# EAGLE board Board_Schamatic07 (EAGLE 9.6.2)
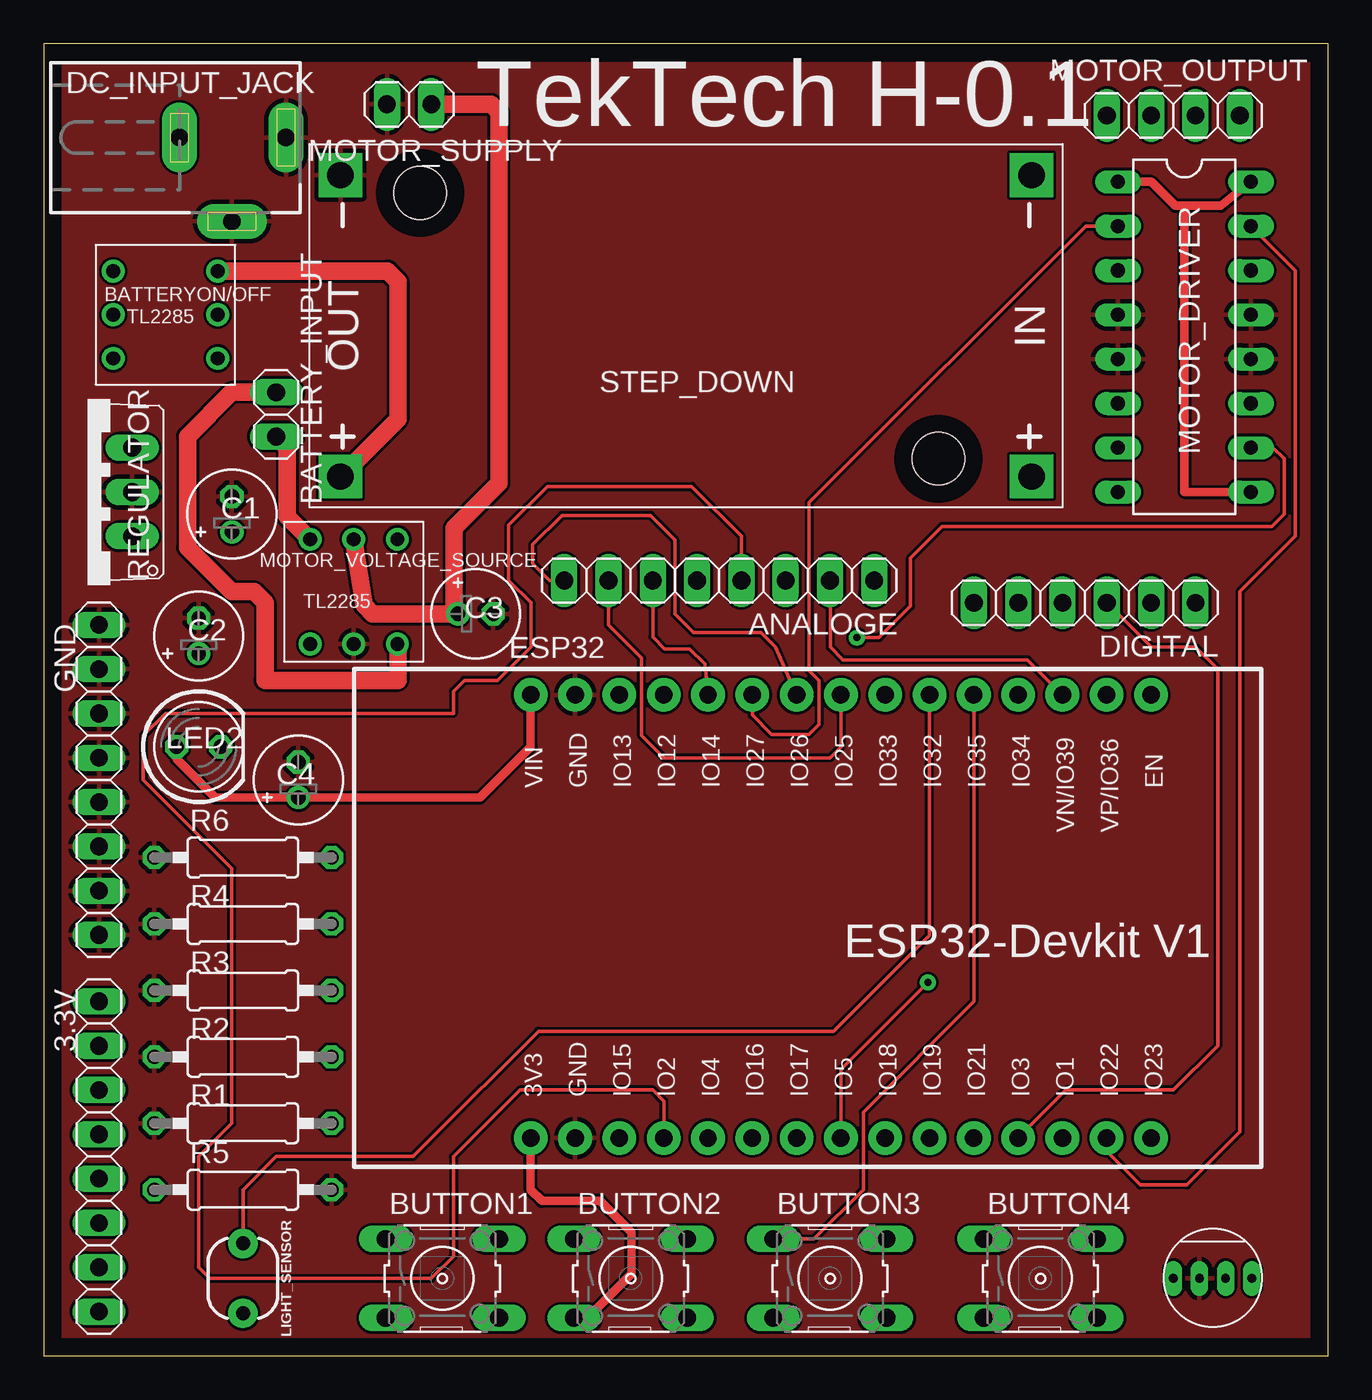
[diagram p0: board, top side]
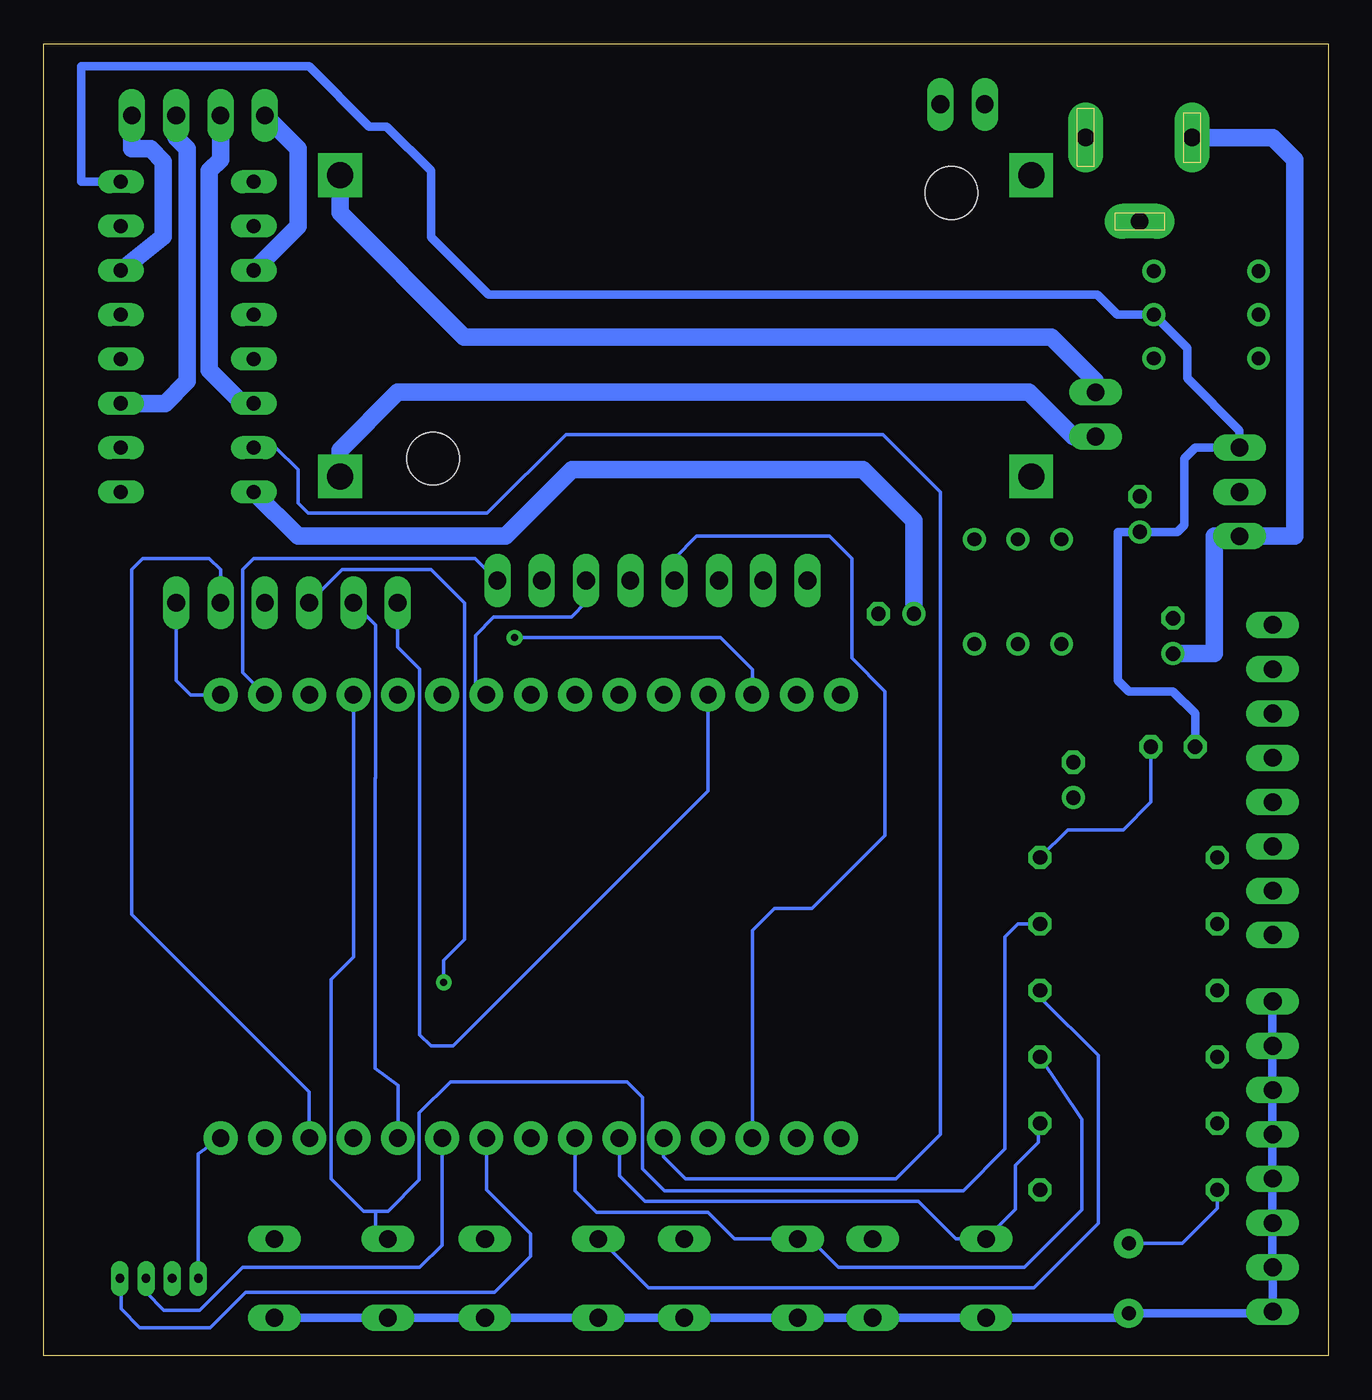
[diagram p1: board, bottom side, seen from below]

Size 73.64 x 75.23 mm. Coordinates in mm from the lower left corner, seen from the top.
Outline: 0,0 73.64,0 73.64,75.23 0,75.23 0,0
Copper layers (1*16): Top 0.035mm / dielectric 1.5mm / Bottom 0.035mm
Design rules "default *": minimum track width 7mil, minimum drill 0.4mm, track to track 6mil, track to pad 6mil, pad to pad 6mil, via to via 6mil, smd to smd 6mil, copper to edge 40mil, drill to drill 6mil, minimum pad ring 10mil, minimum via ring 10mil, stop-mask expansion 4mil, vias tented up to drill 0mil, thermal gap 10mil

## Footprints (pad centres in the part's own frame; a part is rotated, then mirrored left to right if it is on the bottom)
1X08 = drill 1.016 long: 1 -8.89,0; 2 -6.35,0; 3 -3.81,0; 4 -1.27,0; 5 1.27,0; 6 3.81,0; 7 6.35,0; 8 8.89,0
1X02 = drill 1.016 long: 1 -1.27,0; 2 1.27,0
TL2285_PCB = drill 0.8: 1 -2.5,-3; 2 0,-3; 3 2.5,-3; 4 -2.5,3; 5 0,3; 6 2.5,3
B3F-10XX = drill 1.016 long: 1 -3.251,2.261; 2 3.251,2.261; 3 -3.251,-2.261; 4 3.251,-2.261
E2-5 = drill 0.813 pad 1.27: + -1.016,0 | drill 0.813 pad 1.27 octagon: - 1.016,0
DCJ0202 = drill 1 pad 2 long: 1 0,3.1; 2 4.8,0; 3 0,-3
1X06 = drill 1.016 long: 1 -6.35,0; 2 -3.81,0; 3 -1.27,0; 4 1.27,0; 5 3.81,0; 6 6.35,0
ESP32-DEVKITV1 = drill 1 pad 1.93: 3V3 -16.52,-12.27; D1 13.96,-12.27; D2 -8.9,-12.27; D3 11.42,-12.27; D4 -6.36,-12.27; D5 1.26,-12.27; D12 -8.9,13.135; D13 -11.44,13.135; D14 -6.36,13.135; D15 -11.44,-12.27; D16 -3.82,-12.27; D17 -1.28,-12.27; D18 3.8,-12.27; D19 6.34,-12.27; D21 8.88,-12.27; D22 16.5,-12.27; D23 19.04,-12.27; D25 1.26,13.135; D26 -1.28,13.135; D27 -3.82,13.135; D32 6.34,13.135; D33 3.8,13.135; D34 11.42,13.135; D35 8.88,13.135; D36 16.5,13.135; D39 13.96,13.135; EN 19.04,13.135; GND@1 -13.98,13.135; GND@2 -13.98,-12.27; VIN -16.52,13.135
LED5MM = drill 0.813 octagon: A -1.27,0; K 1.27,0
PHOTOCELL = drill 0.8 pad 1.676: 1 -2,0; 2 2,0
DIL16 = drill 0.813 long: 1 -8.89,-3.81; 2 -6.35,-3.81; 3 -3.81,-3.81; 4 -1.27,-3.81; 5 1.27,-3.81; 6 3.81,-3.81; 7 6.35,-3.81; 8 8.89,-3.81; 9 8.89,3.81; 10 6.35,3.81; 11 3.81,3.81; 12 1.27,3.81; 13 -1.27,3.81; 14 -3.81,3.81; 15 -6.35,3.81; 16 -8.89,3.81
1X04 = drill 1.016 long: 1 -3.81,0; 2 -1.27,0; 3 1.27,0; 4 3.81,0
0207/10 = drill 0.813 octagon: 1 -5.08,0; 2 5.08,0
TO220V = drill 1.016 long: 1 -2.54,-2.54; 2 0,-2.54; 3 2.54,-2.54
LED-4_PIN = drill 0.5 long: P$1 0,0; P$2 0,4.5; P$5 0,1.5; P$7 0,3
DC-DC-STEP-DOWN-LM2596 = drill 1.5 pad 2.5 square: IN+ -19.812,8.636; IN- -19.812,-8.636; OUT+ 19.812,8.636; OUT- 19.812,-8.636 | hole 3: -14.478,7.62; 15.24,-7.62

## Placement (x,y rotation side)
3.3V  [1X08]  3.17,11.43 270 top
ANALOGE  [1X08]  38.73,44.45 180 top
BATTERY_INPUT  [1X02]  13.34,53.98 90 top
BATTERYON/OFF  TL2285  [TL2285_PCB]  6.99,59.69 90 top
BUTTON1  [B3F-10XX]  22.86,4.45 0 top
BUTTON2  [B3F-10XX]  33.66,4.45 0 top
BUTTON3  [B3F-10XX]  45.09,4.45 0 top
BUTTON4  [B3F-10XX]  57.15,4.45 0 top
C1  100uf  [E2-5]  10.79,48.26 90 top
C2  470uf  [E2-5]  8.89,41.27 90 top
C3  100uf  [E2-5]  24.77,42.55 0 top
C4  100uf  [E2-5]  14.61,33.02 90 top
DC_INPUT_JACK  DCJ0202  [DCJ0202]  10.79,69.85 270 top
DIGITAL  [1X06]  59.69,43.18 180 top
ESP32  ESP32DEVKITV1  [ESP32-DEVKITV1]  44.45,24.77 0 top
GND  [1X08]  3.17,33.02 270 top
LED2  [LED5MM]  8.89,34.92 0 top
LIGHT_SENSOR  PHOTOCELLPTH  [PHOTOCELL]  11.43,4.45 270 top
MOTOR_DRIVER  L293D  [DIL16]  65.41,58.42 270 top
MOTOR_OUTPUT  [1X04]  64.77,71.12 180 top
MOTOR_SUPPLY  [1X02]  20.95,71.75 0 top
MOTOR_VOLTAGE_SOURCE  TL2285  [TL2285_PCB]  17.78,43.81 180 top
R1  10k  [0207/10]  11.43,13.34 180 top
R2  10k  [0207/10]  11.43,17.14 180 top
R3  10k  [0207/10]  11.43,20.95 180 top
R4  10k  [0207/10]  11.43,24.77 180 top
R5  10k  [0207/10]  11.43,9.53 0 top
R6  220  [0207/10]  11.43,28.57 0 top
REGULATOR  7805TV  [TO220V]  2.54,49.53 90 top
RGB  [LED-4_PIN]  64.77,4.45 270 top
STEP_DOWN  DC-DC-STEP-DOWN-LM2596  [DC-DC-STEP-DOWN-LM2596]  36.83,59.05 180 top

## Library data of the parts
3.3V ANALOGE BATTERY_INPUT DIGITAL GND MOTOR_OUTPUT MOTOR_SUPPLY = pinhead
BATTERYON/OFF MOTOR_VOLTAGE_SOURCE = L71_devices
BUTTON1-BUTTON4 = switch-omron; MPN: B3F-1000; OC_FARNELL: 176432; OC_NEWARK: 36M3542
C1-C4 = rcl; SPICEPREFIX: C
DC_INPUT_JACK = con-jack; OC_FARNELL: unknown; OC_NEWARK: unknown
ESP32 = ESP32-DEVKITV1
LED2 = led
LIGHT_SENSOR = SparkFun-Sensors; PROD_ID: COMP-09129; SF_ID: SEN-09088
MOTOR_DRIVER = st-microelectronics; MPN: L293D; OC_FARNELL: 9589619; OC_NEWARK: 56P8249
R1-R6 = rcl; SPICEPREFIX: R
REGULATOR = linear
RGB = RGB-Led
STEP_DOWN = diy-modules

## Nets
3.3V: 3.3V.1 3.3V.2 3.3V.3 3.3V.4 3.3V.5 3.3V.6 3.3V.7 3.3V.8 BUTTON1.3 BUTTON1.4 BUTTON2.3 BUTTON2.4 BUTTON3.3 BUTTON3.4 BUTTON4.3 BUTTON4.4 ESP32.3V3 LIGHT_SENSOR.2
5-12V: C3.+ MOTOR_DRIVER.8 MOTOR_SUPPLY.2 MOTOR_VOLTAGE_SOURCE.2
5V: BATTERYON/OFF.2 C1.+ C4.+ ESP32.VIN LED2.A MOTOR_DRIVER.1 MOTOR_DRIVER.9 MOTOR_DRIVER.16 REGULATOR.3
+V: BATTERY_INPUT.1 MOTOR_VOLTAGE_SOURCE.3 STEP_DOWN.IN+
-V: BATTERY_INPUT.2 MOTOR_VOLTAGE_SOURCE.4 STEP_DOWN.IN-
A1CH0: ANALOGE.1 ESP32.D36
A1CH3: ANALOGE.2 ESP32.D39
A1CH5: ANALOGE.3 ESP32.D33
A2CH2: ANALOGE.4 ESP32.D2
A2CH3: ANALOGE.5 ESP32.D15
A2CH6: ANALOGE.6 ESP32.D14
A2CH8: ANALOGE.7 ESP32.D25
A2CH9: ANALOGE.8 ESP32.D26
BLUE: ESP32.D18 RGB.P$2
D1: DIGITAL.2 ESP32.D1
D3: DIGITAL.3 ESP32.D3
D5: DIGITAL.4 ESP32.D5
D12: DIGITAL.6 ESP32.D12
D21: DIGITAL.5 ESP32.D21
EN: DIGITAL.1 ESP32.EN
GND: C1.- C2.- C3.- C4.- DC_INPUT_JACK.1 DC_INPUT_JACK.2 ESP32.GND@1 ESP32.GND@2 GND.1 GND.2 GND.3 GND.4 GND.5 GND.6 GND.7 GND.8 MOTOR_DRIVER.4 MOTOR_DRIVER.5 MOTOR_DRIVER.12 MOTOR_DRIVER.13 MOTOR_SUPPLY.1 MOTOR_VOLTAGE_SOURCE.5 R1.2 R2.2 R3.2 R4.2 R5.2 R6.1 REGULATOR.2 RGB.P$5 STEP_DOWN.OUT-
GREEN: ESP32.D19 RGB.P$7
IN: C2.+ DC_INPUT_JACK.3 REGULATOR.1
IN1-1: ESP32.D27 MOTOR_DRIVER.2
IN1-2: ESP32.D4 MOTOR_DRIVER.7
IN2-1: ESP32.D22 MOTOR_DRIVER.15
IN2-2: ESP32.D13 MOTOR_DRIVER.10
N$2: BATTERYON/OFF.3 STEP_DOWN.OUT+
N$4: LED2.K R6.2
N$5: BUTTON3.1 ESP32.D35 R3.1
N$6: BUTTON4.1 ESP32.D34 R4.1
N$9: ESP32.D32 LIGHT_SENSOR.1 R5.1
N$10: BUTTON1.1 ESP32.D16 R1.1
N$11: BUTTON2.1 ESP32.D17 R2.1
O1-1: MOTOR_DRIVER.3 MOTOR_OUTPUT.4
O1-2: MOTOR_DRIVER.6 MOTOR_OUTPUT.3
O2-1: MOTOR_DRIVER.14 MOTOR_OUTPUT.1
O2-2: MOTOR_DRIVER.11 MOTOR_OUTPUT.2
RED: ESP32.D23 RGB.P$1

## Tracks (layer width: path | path; a pad name or v marks a point on that pad's centre or on a via)
3.3V
  Top 0.5: BUTTON2.3 31.19,2.18 33.72,4.71 33.72,7.1 31.91,8.9 31.9,8.89 28.57,8.89 27.93,9.54 ESP32.3V3
  Bottom 0.5: 3.2,15.24 3.2,17.68 3.3V.2 3.2,17.83 3.2,20.27 3.3V.1 | 3.2,7.62 3.2,5.18 3.17,5.16 3.3V.7 3.3V.8 3.25,2.54 3.35,2.44 LIGHT_SENSOR.2 11.69,2.18 BUTTON1.3 19.71,2.29 19.81,2.18 BUTTON1.4 BUTTON2.3 BUTTON2.4 BUTTON3.3 41.76,2.29 41.86,2.18 BUTTON3.4 BUTTON4.3 BUTTON4.4 | 3.2,7.62 3.2,10.06 3.3V.5 3.2,10.21 3.2,12.65 3.3V.4 3.2,12.8 3.2,15.24 | 3.2,7.62 3.3V.6 | 3.2,15.24 3.3V.3
5-12V
  Top 0.813: 23.55,42.75 C3.+
  Top 1: MOTOR_VOLTAGE_SOURCE.2 18.37,43.04 18.86,42.55 C3.+ | MOTOR_SUPPLY.2 25.65,71.75 26.11,71.3 26.11,50.04 23.55,47.47 23.55,42.75
  Bottom 1: MOTOR_DRIVER.8 59.05,46.99 47.17,46.99 43.36,50.8 26.67,50.8 23.75,47.88 C3.+
5V
  Top 0.5: 65.41,65.94 67.5,65.94 MOTOR_DRIVER.16 | 65.41,65.94 64.87,65.94 63.5,67.31 MOTOR_DRIVER.1 | LED2.A 7.62,34.21 9.83,32 C4.+ 25.02,32 27.93,34.91 ESP32.VIN | 65.41,65.94 65.41,49.53 MOTOR_DRIVER.9
  Bottom 0.5: MOTOR_DRIVER.16 71.49,67.31 71.49,73.94 58.42,73.94 54.97,70.48 53.98,70.48 51.44,67.94 51.44,64.14 48.13,60.83 13.23,60.83 12.09,59.69 BATTERYON/OFF.2 8.08,57.78 8.08,56.05 5.08,53.05 REGULATOR.3 7.62,52.07 8.26,51.44 8.26,47.62 8.64,47.24 C1.+ 12.06,47.24 12.06,38.73 11.43,38.1 8.89,38.1 7.62,36.83 LED2.A
+V
  Top 1: BATTERY_INPUT.1 13.97,52.07 13.97,48.12 MOTOR_VOLTAGE_SOURCE.3
  Bottom 1: STEP_DOWN.IN+ 56.64,51.94 53.34,55.24 17.14,55.24 14.61,52.7 BATTERY_INPUT.1
-V
  Top 1: BATTERY_INPUT.2 10.79,55.24 8.26,52.7 8.26,46.35 10.79,43.81 12.06,43.81 12.7,43.18 12.7,38.73 20.32,38.73 20.32,40.77 MOTOR_VOLTAGE_SOURCE.4
  Bottom 1: STEP_DOWN.IN- 56.64,65.53 49.53,58.42 15.88,58.42 13.34,55.88 BATTERY_INPUT.2
A1CH0
  Bottom 0.203: ANALOGE.1 48.9,45.72 61.59,45.72 62.23,45.09 62.23,39.18 ESP32.D36
A1CH3
  Top 0.203: ANALOGE.2 45.11,44.42 45.11,40.64 45.1,40.63 45.83,39.9 47.62,39.9 56.41,39.9 ESP32.D39
A1CH5
  Bottom 0.203: ESP32.D33 48.88,38.53 48.88,41.31 47.83,42.37 43.38,42.37 42.55,43.2 ANALOGE.3
A2CH2
  Top 0.203: ESP32.D2 35.56,14.61 34.92,15.24 27.3,15.24 23.5,11.43 23.5,5.71 22.23,4.45 9.53,4.45 8.89,5.08 8.89,11.43 10.79,13.34 10.79,27.94 10.48,28.26 5.71,33.02 5.71,35.56 6.99,36.83 23.5,36.83 23.5,38.1 24.13,38.73 26.04,38.73 27.94,40.64 27.94,43.18 26.67,44.45 26.67,47.62 28.89,49.85 37.15,49.85 40.01,46.99 ANALOGE.4
A2CH3
  Bottom 0.203: ESP32.D15 33.01,17.78 33.01,24.39 31.75,25.65 29.59,25.65 25.4,29.84 25.4,38.1 27.3,40.01 27.3,45.72 28.57,46.99 36.2,46.99 37.47,45.72 ANALOGE.5
A2CH6
  Top 0.203: ESP32.D14 37.91,39.66 37.03,40.54 35.61,40.54 34.92,41.22 ANALOGE.6
A2CH8
  Top 0.203: ESP32.D25 45.71,34.91 45.09,34.29 35.56,34.29 34.29,35.56 34.29,40.01 32.38,41.91 ANALOGE.7
A2CH9
  Top 0.203: ESP32.D26 41.95,40.65 41.12,41.48 37.26,41.48 36.2,42.55 36.2,46.79 34.8,48.18 29.72,48.18 28.04,46.51 28.04,45.72 28.04,45.41 29.01,44.45 ANALOGE.8
BLUE
  Bottom 0.203: RGB.P$2 69.19,4.42 69.19,2.69 68.12,1.63 64.08,1.63 62.06,3.65 47.79,3.65 45.72,5.71 45.72,7 48.25,9.53 ESP32.D18
D1
  Bottom 0.203: DIGITAL.2 63.5,45.09 64.14,45.72 67.94,45.72 68.58,45.09 68.58,25.31 58.41,15.14 ESP32.D1
D3
  Top 0.203: DIGITAL.3 63.5,40.64 66.04,40.64 67.31,39.37 67.31,17.78 64.77,15.24 58.62,15.24 ESP32.D3
D5  (via drill 0.4)
  Top 0.203: ESP32.D5 45.71,16.42 v50.7,21.41
  Bottom 0.203: v50.7,21.41 50.7,22.68 49.51,23.88 49.51,43.16 51.44,45.09 56.52,45.09 DIGITAL.4
D12
  Bottom 0.203: DIGITAL.6 53.34,40.64 52.07,39.37 52.07,18.41 51.44,17.78 50.16,17.78 35.55,32.4 ESP32.D12
D21
  Bottom 0.203: ESP32.D21 53.33,15.51 54.62,16.49 54.62,33.13 54.61,33.15 54.61,41.91 DIGITAL.5
EN
  Bottom 0.203: DIGITAL.1 66.04,38.73 65.2,37.9 ESP32.EN
GND
  pour Top: 0,74.3 0,0 73.66,0 73.66,74.3
GREEN
  Bottom 0.203: ESP32.D19 50.79,7 50.8,6.99 50.8,6.35 52.07,5.08 62.23,5.08 64.69,2.62 66.75,2.62 67.77,3.63 RGB.P$7
IN
  Bottom 1: C2.+ 6.53,40.26 6.53,46.99 REGULATOR.1 1.91,46.99 1.91,68.58 3.17,69.85 DC_INPUT_JACK.3
IN1-1
  Top 0.203: MOTOR_DRIVER.2 59.74,64.77 43.89,48.92 43.89,39.29 44.45,38.73 44.45,36.2 43.89,35.64 41.73,35.64 40.63,36.74 ESP32.D27
IN1-2
  Bottom 0.203: ESP32.D4 38.09,11.42 36.83,10.16 24.77,10.16 22.23,12.7 22.23,49.53 25.51,52.82 43.7,52.82 48.21,48.31 58.47,48.31 59.05,48.9 59.05,50.8 60.33,52.07 MOTOR_DRIVER.7
IN2-1
  Top 0.203: MOTOR_DRIVER.15 71.75,62.23 71.75,46.99 68.58,43.81 68.58,12.83 65.55,9.8 62.87,9.8 60.95,11.72 ESP32.D22
IN2-2  (via drill 0.4)
  Top 0.203: v46.63,41.17 47.9,41.17 49.71,42.98 49.71,45.74 51.51,47.55 70.41,47.55 71.12,48.26 71.12,51.44 70.48,52.07 MOTOR_DRIVER.10
  Bottom 0.203: ESP32.D13 33.01,39.36 34.82,41.17 v46.63,41.17
N$2
  Top 1: BATTERYON/OFF.3 19.73,62.19 20.32,61.59 20.32,53.72 STEP_DOWN.OUT+
N$4
  Bottom 0.203: R6.2 14.92,30.16 11.75,30.16 10.16,31.75 LED2.K
N$5
  Top 0.203: ESP32.D35 53.33,20.31 46.99,13.97 46.99,9.53 44.17,6.71 BUTTON3.1
  Bottom 0.203: R3.1 16.46,20.88 16.46,20.5 13.18,17.22 13.18,7.59 16.87,3.91 38.96,3.91 41.76,6.71 BUTTON3.1
N$6
  Bottom 0.203: ESP32.D34 55.88,22.86 57.15,21.59 57.15,10.16 55.29,8.3 54.61,8.3 | 54.61,8.3 53.9,8.3 52.11,10.09 52.11,13.93 50.32,15.72 40.21,15.72 40.18,15.7 39.31,14.82 39.31,10.73 38.05,9.47 20.9,9.47 18.52,11.86 18.52,24.03 17.78,24.77 R4.1 | 54.61,8.3 54.61,7.42 BUTTON4.1
N$9
  Top 0.203: ESP32.D32 50.79,24.12 45.29,18.62 28.37,18.62 22.02,12.27 21.18,11.43 13.34,11.43 11.43,9.53 LIGHT_SENSOR.1
  Bottom 0.203: R5.1 6.35,8.46 8.36,6.45 LIGHT_SENSOR.1
N$10
  Bottom 0.203: R1.1 16.61,13.26 16.61,12.24 17.92,10.94 17.92,8.39 BUTTON1.1 | 19.51,6.71 BUTTON1.1 | ESP32.D16 40.63,10.33 39.17,8.87 23.5,8.87 21.34,6.71 BUTTON1.1
N$11
  Bottom 0.203: R2.1 14.12,13.56 14.12,8.38 17.42,5.08 28.07,5.08 29.69,6.71 BUTTON2.1 34.02,6.71 35.56,8.24 41.95,8.24 43.17,9.46 ESP32.D17
O1-1
  Bottom 1: MOTOR_DRIVER.3 59.05,64.77 59.05,69.22 MOTOR_OUTPUT.4
O1-2
  Bottom 1: MOTOR_DRIVER.6 62.23,54.61 64.14,56.52 64.14,67.94 63.5,68.58 MOTOR_OUTPUT.3
O2-1
  Bottom 1: MOTOR_DRIVER.14 66.78,64.18 66.78,68.48 67.51,69.22 68.58,69.22 MOTOR_OUTPUT.1
O2-2
  Bottom 1: MOTOR_OUTPUT.2 66.04,69.85 65.41,69.22 65.41,55.88 66.67,54.61 MOTOR_DRIVER.11
RED
  Bottom 0.203: ESP32.D23 64.77,11.57 64.77,8.81 RGB.P$1

## Text on the board
tPlace: TekTech H-0.1